# EAGLE board filterboard2layer (EAGLE 6.6.0)
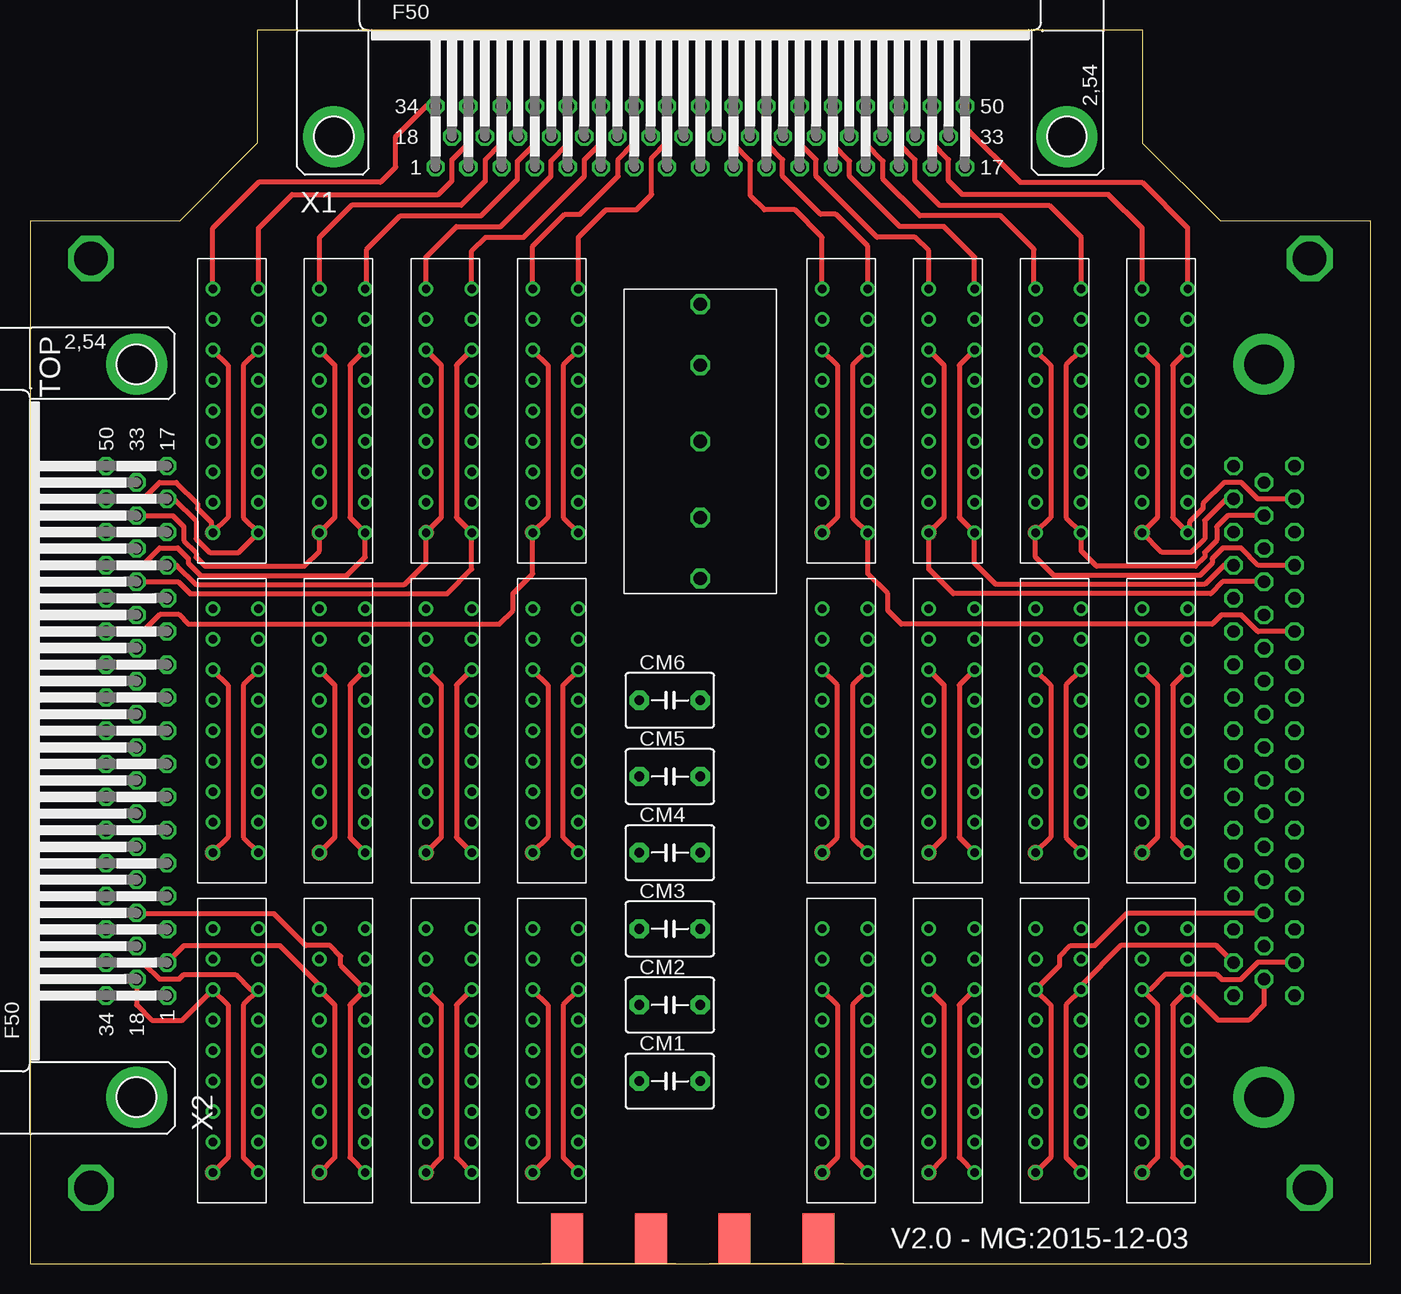
[diagram p0: board, top side]
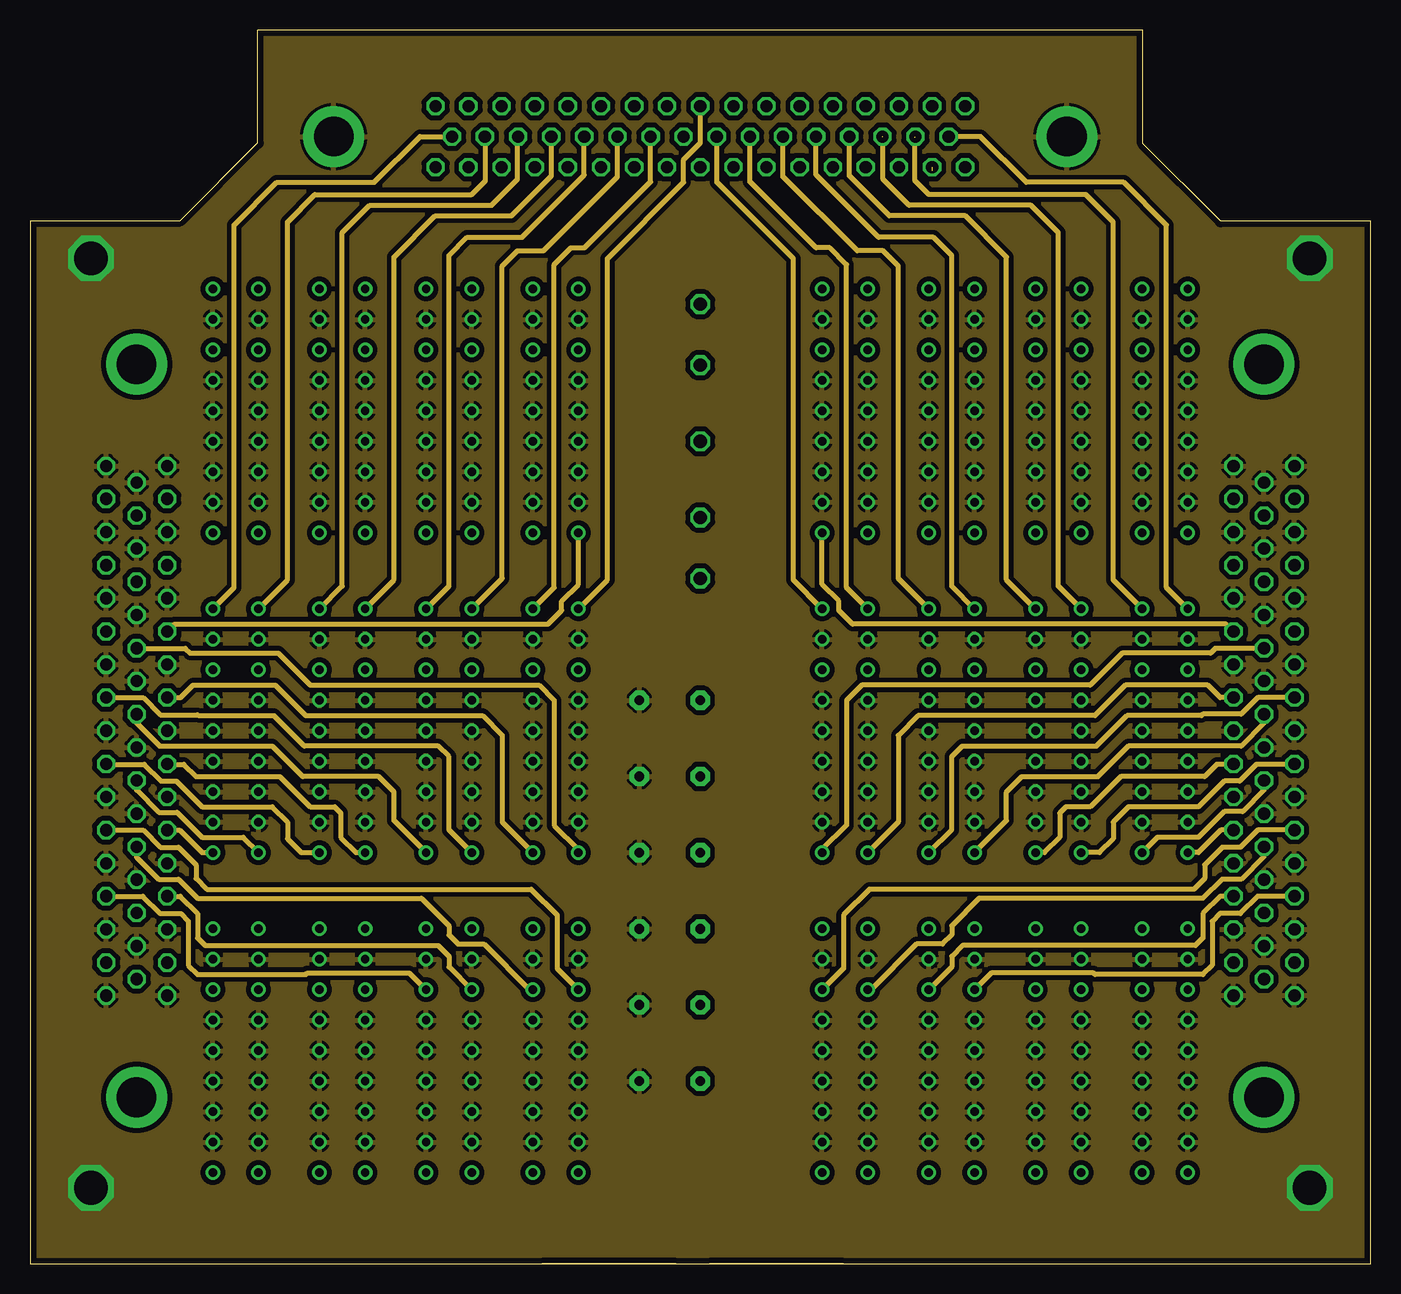
[diagram p1: board, inner layer Route2]
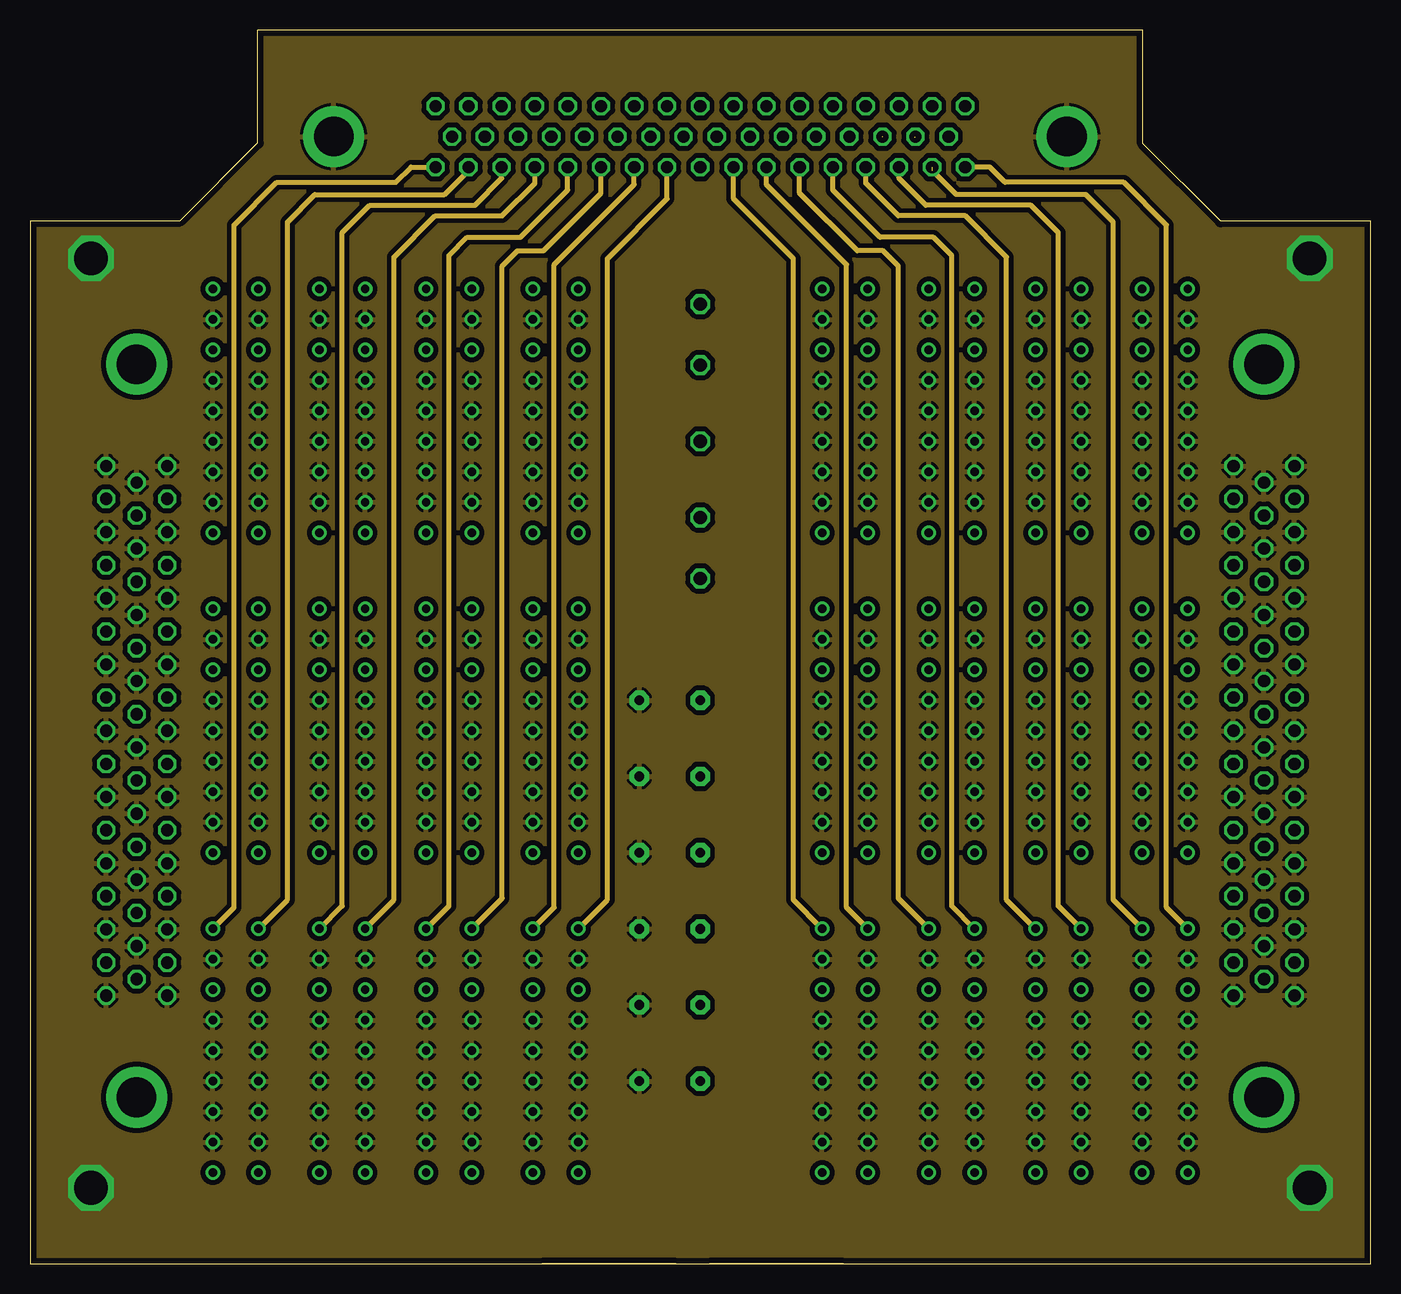
[diagram p2: board, inner layer Route15]
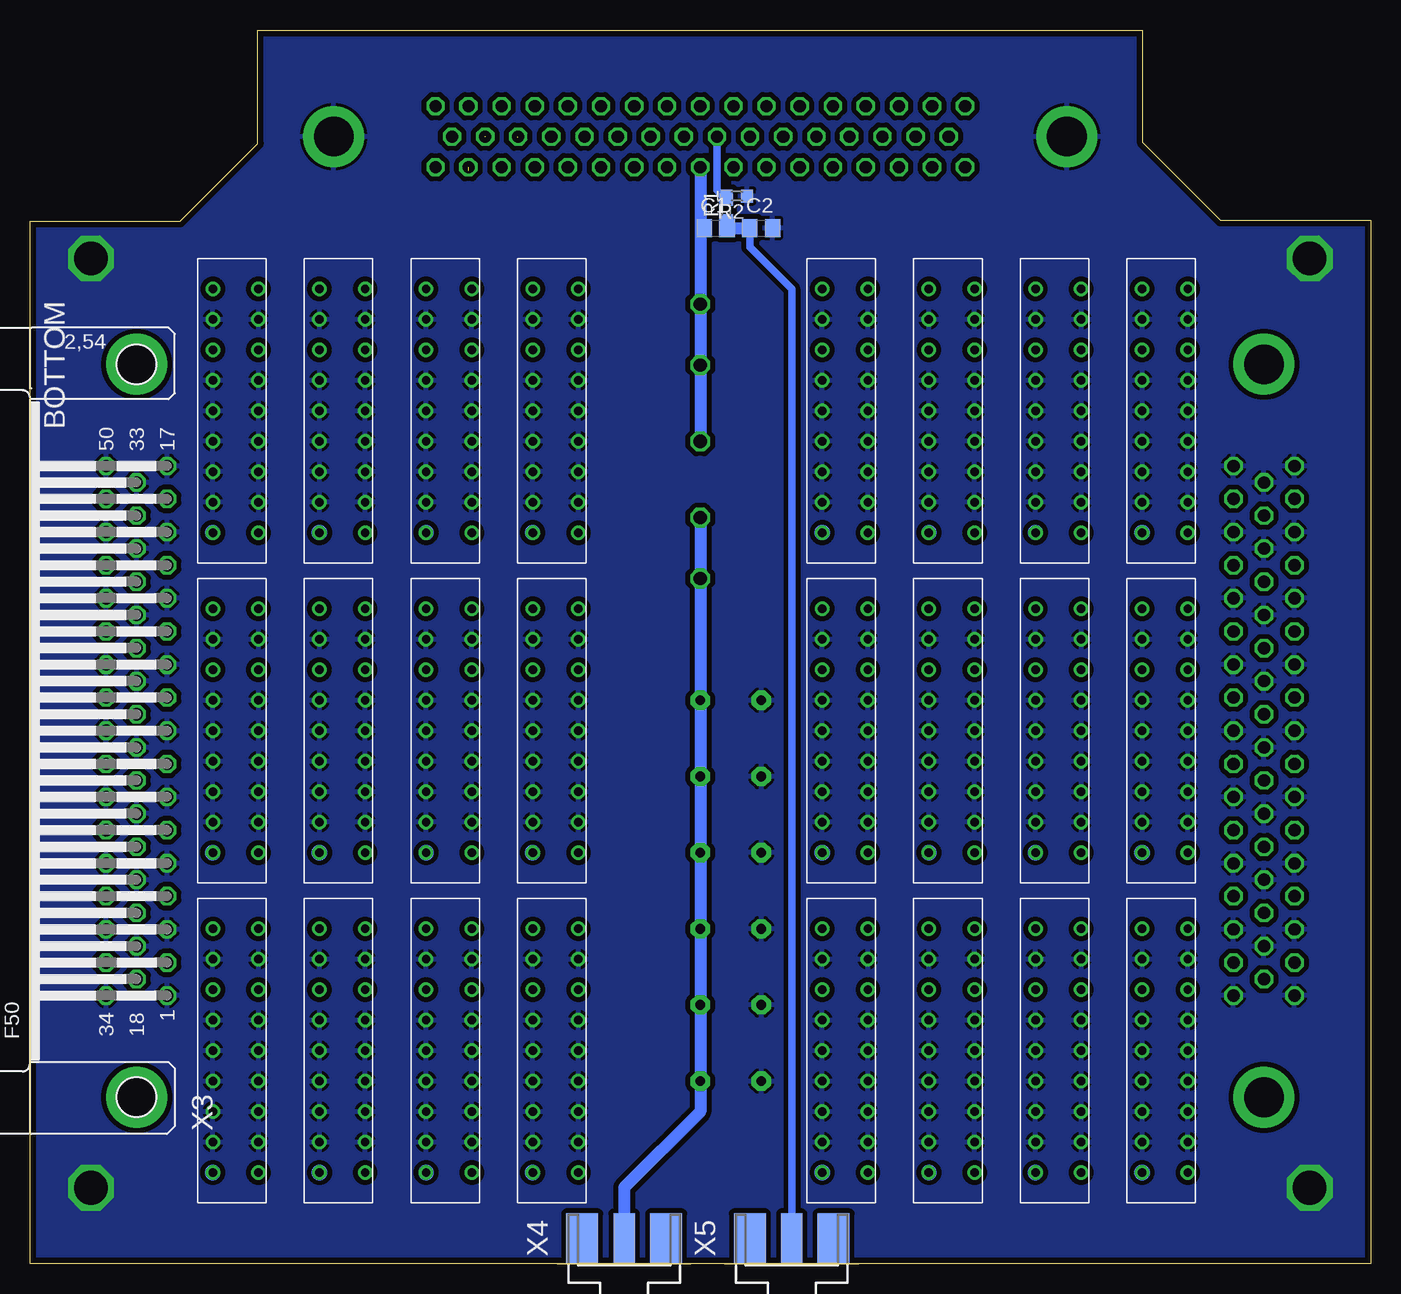
[diagram p3: board, bottom side, seen from below]

Size 111.76 x 102.87 mm. Coordinates in mm from the lower left corner, seen from the top.
Outline: 0,0 111.76,0 111.76,86.93 99.25,86.93 92.77,93.41 92.77,102.87 18.99,102.87 18.99,93.47 12.51,86.99 0,86.99 0,0
Copper layers (1*2*15*16): Top 0.035mm / dielectric 0.27mm / Route2 0.035mm / dielectric 0.27mm / Route15 0.035mm / dielectric 0.27mm / Bottom 0.035mm
Design rules "DRC_AdvancedCircuits *": minimum track width 5mil, minimum drill 15mil, track to track 5mil, track to pad 5mil, pad to pad 5mil, via to via 5mil, smd to smd 3mil, copper to edge 20mil, drill to drill 10mil, minimum pad ring 10mil, minimum via ring 8mil, stop-mask expansion 4mil, vias tented up to drill 15mil, thermal gap 10mil

## Footprints (pad centres in the part's own frame; a part is rotated, then mirrored left to right if it is on the bottom)
C0805 = smd 1.3 x 1.5: 1 -0.95,0; 2 0.95,0
C5B4.5 = drill 0.813 pad 1.6 octagon: 1 -2.54,0; 2 2.54,0
R0603 = smd 1 x 1.1: 1 -0.85,0; 2 0.85,0
COILCRAFT-LC7POLE = drill 0.7: FILTER-INPUT -10.16,0; FILTER-OUTPUT 10.16,0; GND0 -7.62,0; GND1 -2.54,0; GND2 2.54,0; GND3 7.62,0; NC0 -5.08,0; NC1 0,0; NC2 5.08,0
XINDUCTOR = drill 1.1 octagon: INPUT -11.43,0; INPUT2 -6.35,0; INPUT3 0,0; OUTPUT1 6.35,0; OUTPUT2 11.43,0
F50HP = drill 1.016 octagon: 1 -22.073,-2.54; 2 -19.329,-2.54; 3 -16.561,-2.54; 4 -13.792,-2.54; 5 -11.049,-2.54; 6 -8.28,-2.54; 7 -5.512,-2.54; 8 -2.769,-2.54; 9 0,-2.54; 10 2.769,-2.54; 11 5.512,-2.54; 12 8.28,-2.54; 13 11.049,-2.54; 14 13.792,-2.54; 15 16.561,-2.54; 16 19.329,-2.54; 17 22.073,-2.54; 18 -20.701,0; 19 -17.958,0; 20 -15.189,0; 21 -12.421,0; 22 -9.677,0; 23 -6.909,0; 24 -4.14,0; 25 -1.397,0; 26 1.372,0; 27 4.14,0; 28 6.883,0; 29 9.652,0; 30 12.421,0; 31 15.189,0; 32 17.932,0; 33 20.701,0; 34 -22.073,2.54; 35 -19.329,2.54; 36 -16.561,2.54; 37 -13.792,2.54; 38 -11.049,2.54; 39 -8.28,2.54; 40 -5.512,2.54; 41 -2.769,2.54; 42 0,2.54; 43 2.769,2.54; 44 5.512,2.54; 45 8.28,2.54; 46 11.049,2.54; 47 13.792,2.54; 48 16.561,2.54; 49 19.329,2.54; 50 22.073,2.54 | drill 3.302 pad 5.08: G1 -30.556,0; G2 30.556,0
J502-ND-142-0711-821/826 = smd 4.191 x 1.778: 1 2.115,0 | smd 4.191 x 2.667: G@1 2.115,3.495; G@2 2.115,-3.495 | smd 4.191 x 2.667 bottom: G@3 2.115,3.495; G@4 2.115,-3.495

## Placement (x,y rotation side)
C1  1pF  [C0805]  54.61,86.36 0 bottom
C2  1000pF  [C0805]  50.8,86.36 0 bottom
CM1  [C5B4.5]  53.34,15.24 0 top
CM2  [C5B4.5]  53.34,21.59 0 top
CM3  [C5B4.5]  53.34,27.94 0 top
CM4  [C5B4.5]  53.34,34.29 0 top
CM5  [C5B4.5]  53.34,40.64 0 top
CM6  [C5B4.5]  53.34,46.99 0 top
R1  [R0603]  53.72,87.88 90 bottom
R2  [R0603]  52.83,89.03 180 bottom
U$1  COILCRAFT-LC7POLE  [COILCRAFT-LC7POLE]  83.82,44.45 90 top
U$2  COILCRAFT-LC7POLE  [COILCRAFT-LC7POLE]  27.94,44.45 90 bottom
U$3  COILCRAFT-LC7POLE  [COILCRAFT-LC7POLE]  33.02,44.45 90 top
U$4  COILCRAFT-LC7POLE  [COILCRAFT-LC7POLE]  36.83,44.45 90 bottom
U$5  COILCRAFT-LC7POLE  [COILCRAFT-LC7POLE]  41.91,71.12 90 top
U$6  COILCRAFT-LC7POLE  [COILCRAFT-LC7POLE]  41.91,44.45 90 top
U$7  COILCRAFT-LC7POLE  [COILCRAFT-LC7POLE]  15.24,71.12 90 top
U$8  COILCRAFT-LC7POLE  [COILCRAFT-LC7POLE]  24.13,71.12 90 top
U$9  COILCRAFT-LC7POLE  [COILCRAFT-LC7POLE]  19.05,71.12 90 bottom
U$10  COILCRAFT-LC7POLE  [COILCRAFT-LC7POLE]  45.72,17.78 90 bottom
U$11  COILCRAFT-LC7POLE  [COILCRAFT-LC7POLE]  36.83,17.78 90 bottom
U$12  COILCRAFT-LC7POLE  [COILCRAFT-LC7POLE]  15.24,44.45 90 top
U$13  COILCRAFT-LC7POLE  [COILCRAFT-LC7POLE]  78.74,44.45 90 bottom
U$14  COILCRAFT-LC7POLE  [COILCRAFT-LC7POLE]  74.93,44.45 90 top
U$15  COILCRAFT-LC7POLE  [COILCRAFT-LC7POLE]  69.85,71.12 90 bottom
U$16  COILCRAFT-LC7POLE  [COILCRAFT-LC7POLE]  69.85,44.45 90 bottom
U$17  COILCRAFT-LC7POLE  [COILCRAFT-LC7POLE]  96.52,71.12 90 bottom
U$18  COILCRAFT-LC7POLE  [COILCRAFT-LC7POLE]  19.05,17.78 90 bottom
U$19  COILCRAFT-LC7POLE  [COILCRAFT-LC7POLE]  24.13,17.78 90 top
U$20  COILCRAFT-LC7POLE  [COILCRAFT-LC7POLE]  27.94,17.78 90 bottom
U$21  COILCRAFT-LC7POLE  [COILCRAFT-LC7POLE]  33.02,71.12 90 top
U$22  COILCRAFT-LC7POLE  [COILCRAFT-LC7POLE]  27.94,71.12 90 bottom
U$23  COILCRAFT-LC7POLE  [COILCRAFT-LC7POLE]  87.63,71.12 90 bottom
U$24  COILCRAFT-LC7POLE  [COILCRAFT-LC7POLE]  92.71,71.12 90 top
U$25  COILCRAFT-LC7POLE  [COILCRAFT-LC7POLE]  66.04,17.78 90 top
U$26  COILCRAFT-LC7POLE  [COILCRAFT-LC7POLE]  74.93,17.78 90 top
U$27  COILCRAFT-LC7POLE  [COILCRAFT-LC7POLE]  96.52,44.45 90 bottom
U$28  COILCRAFT-LC7POLE  [COILCRAFT-LC7POLE]  92.71,17.78 90 top
U$29  COILCRAFT-LC7POLE  [COILCRAFT-LC7POLE]  87.63,17.78 90 bottom
U$30  COILCRAFT-LC7POLE  [COILCRAFT-LC7POLE]  83.82,17.78 90 top
U$31  COILCRAFT-LC7POLE  [COILCRAFT-LC7POLE]  78.74,71.12 90 bottom
U$32  COILCRAFT-LC7POLE  [COILCRAFT-LC7POLE]  83.82,71.12 90 top
U$33  COILCRAFT-LC7POLE  [COILCRAFT-LC7POLE]  69.85,17.78 90 bottom
U$34  COILCRAFT-LC7POLE  [COILCRAFT-LC7POLE]  41.91,17.78 90 top
U$35  COILCRAFT-LC7POLE  [COILCRAFT-LC7POLE]  15.24,17.78 90 top
U$36  COILCRAFT-LC7POLE  [COILCRAFT-LC7POLE]  24.13,44.45 90 top
U$37  COILCRAFT-LC7POLE  [COILCRAFT-LC7POLE]  96.52,17.78 90 bottom
U$38  COILCRAFT-LC7POLE  [COILCRAFT-LC7POLE]  87.63,44.45 90 bottom
U$39  COILCRAFT-LC7POLE  [COILCRAFT-LC7POLE]  78.74,17.78 90 bottom
U$40  COILCRAFT-LC7POLE  [COILCRAFT-LC7POLE]  74.93,71.12 90 top
U$41  COILCRAFT-LC7POLE  [COILCRAFT-LC7POLE]  33.02,17.78 90 top
U$42  COILCRAFT-LC7POLE  [COILCRAFT-LC7POLE]  36.83,71.12 90 bottom
U$43  COILCRAFT-LC7POLE  [COILCRAFT-LC7POLE]  19.05,44.45 90 bottom
U$44  COILCRAFT-LC7POLE  [COILCRAFT-LC7POLE]  92.71,44.45 90 top
U$45  COILCRAFT-LC7POLE  [COILCRAFT-LC7POLE]  66.04,44.45 90 top
U$46  COILCRAFT-LC7POLE  [COILCRAFT-LC7POLE]  45.72,44.45 90 bottom
U$47  COILCRAFT-LC7POLE  [COILCRAFT-LC7POLE]  45.72,71.12 90 bottom
U$48  COILCRAFT-LC7POLE  [COILCRAFT-LC7POLE]  66.04,71.12 90 top
U$49  XINDUCTOR  [XINDUCTOR]  55.88,68.58 90 top
X1  [F50HP]  55.88,93.98 0 top
X2  [F50HP]  8.89,44.45 90 top
X3  [F50HP]  102.87,44.45 90 bottom
X4  RF IN  [J502-ND-142-0711-821/826]  62.23,0 90 bottom
X5  RF tap  [J502-ND-142-0711-821/826]  48.26,0 90 bottom

## Library data of the parts
C1 C2 = eagle-ltspice; SPICEMODEL: NONE; SPICEPREFIX: C
CM1-CM6 = capacitor-wima
R1 R2 = eagle-ltspice; SPICEMODEL: NONE; SPICEPREFIX: R
U$1-U$48 = Eagle-LC7Filter
U$49 = MichaelsLibrary
X1-X3 = con-subd; OC_FARNELL: unknown; OC_NEWARK: unknown
X4 X5 = con-coax; MF: JOHNSON COMPONENTS; MPN: 142-0711-821; OC_FARNELL: 1019328; OC_NEWARK: 16F3627

## Nets
GND: C2.2 CM1.1 CM2.1 CM3.1 CM4.1 CM5.1 CM6.1 R2.1 U$1.GND0 U$1.GND1 U$1.GND2 U$1.GND3 U$1.NC0 U$1.NC1 U$2.GND0 U$2.GND1 U$2.GND2 U$2.GND3 U$2.NC0 U$2.NC1 U$3.GND0 U$3.GND1 U$3.GND2 U$3.GND3 U$3.NC0 U$3.NC1 U$4.GND0 U$4.GND1 U$4.GND2 U$4.GND3 U$4.NC0 U$4.NC1 U$5.GND0 U$5.GND1 U$5.GND2 U$5.GND3 U$5.NC0 U$5.NC1 U$6.GND0 U$6.GND1 U$6.GND2 U$6.GND3 U$6.NC0 U$6.NC1 U$7.GND0 U$7.GND1 U$7.GND2 U$7.GND3 U$7.NC0 U$7.NC1 U$8.GND0 U$8.GND1 U$8.GND2 U$8.GND3 U$8.NC0 U$8.NC1 U$9.GND0 U$9.GND1 U$9.GND2 U$9.GND3 U$9.NC0 U$9.NC1 U$10.GND0 U$10.GND1 U$10.GND2 U$10.GND3 U$10.NC0 U$10.NC1 U$11.GND0 U$11.GND1 U$11.GND2 U$11.GND3 U$11.NC0 U$11.NC1 U$12.GND0 U$12.GND1 U$12.GND2 U$12.GND3 U$12.NC0 U$12.NC1 U$13.GND0 U$13.GND1 U$13.GND2 U$13.GND3 U$13.NC0 U$13.NC1 U$14.GND0 U$14.GND1 U$14.GND2 U$14.GND3 U$14.NC0 U$14.NC1 U$15.GND0 U$15.GND1 U$15.GND2 U$15.GND3 U$15.NC0 U$15.NC1 U$16.GND0 U$16.GND1 U$16.GND2 U$16.GND3 U$16.NC0 U$16.NC1 U$17.GND0 U$17.GND1 U$17.GND2 U$17.GND3 U$17.NC0 U$17.NC1 U$18.GND0 U$18.GND1 U$18.GND2 U$18.GND3 U$18.NC0 U$18.NC1 U$19.GND0 U$19.GND1 U$19.GND2 U$19.GND3 U$19.NC0 U$19.NC1 U$20.GND0 U$20.GND1 U$20.GND2 U$20.GND3 U$20.NC0 U$20.NC1 U$21.GND0 U$21.GND1 U$21.GND2 U$21.GND3 U$21.NC0 U$21.NC1 U$22.GND0 U$22.GND1 U$22.GND2 U$22.GND3 U$22.NC0 U$22.NC1 U$23.GND0 U$23.GND1 U$23.GND2 U$23.GND3 U$23.NC0 U$23.NC1 U$24.GND0 U$24.GND1 U$24.GND2 U$24.GND3 U$24.NC0 U$24.NC1 U$25.GND0 U$25.GND1 U$25.GND2 U$25.GND3 U$25.NC0 U$25.NC1 U$26.GND0 U$26.GND1 U$26.GND2 U$26.GND3 U$26.NC0 U$26.NC1 U$27.GND0 U$27.GND1 U$27.GND2 U$27.GND3 U$27.NC0 U$27.NC1 U$28.GND0 U$28.GND1 U$28.GND2 U$28.GND3 U$28.NC0 U$28.NC1 U$29.GND0 U$29.GND1 U$29.GND2 U$29.GND3 U$29.NC0 U$29.NC1 U$30.GND0 U$30.GND1 U$30.GND2 U$30.GND3 U$30.NC0 U$30.NC1 U$31.GND0 U$31.GND1 U$31.GND2 U$31.GND3 U$31.NC0 U$31.NC1 U$32.GND0 U$32.GND1 U$32.GND2 U$32.GND3 U$32.NC0 U$32.NC1 U$33.GND0 U$33.GND1 U$33.GND2 U$33.GND3 U$33.NC0 U$33.NC1 U$34.GND0 U$34.GND1 U$34.GND2 U$34.GND3 U$34.NC0 U$34.NC1 U$35.GND0 U$35.GND1 U$35.GND2 U$35.GND3 U$35.NC0 U$35.NC1 U$36.GND0 U$36.GND1 U$36.GND2 U$36.GND3 U$36.NC0 U$36.NC1 U$37.GND0 U$37.GND1 U$37.GND2 U$37.GND3 U$37.NC0 U$37.NC1 U$38.GND0 U$38.GND1 U$38.GND2 U$38.GND3 U$38.NC0 U$38.NC1 U$39.GND0 U$39.GND1 U$39.GND2 U$39.GND3 U$39.NC0 U$39.NC1 U$40.GND0 U$40.GND1 U$40.GND2 U$40.GND3 U$40.NC0 U$40.NC1 U$41.GND0 U$41.GND1 U$41.GND2 U$41.GND3 U$41.NC0 U$41.NC1 U$42.GND0 U$42.GND1 U$42.GND2 U$42.GND3 U$42.NC0 U$42.NC1 U$43.GND0 U$43.GND1 U$43.GND2 U$43.GND3 U$43.NC0 U$43.NC1 U$44.GND0 U$44.GND1 U$44.GND2 U$44.GND3 U$44.NC0 U$44.NC1 U$45.GND0 U$45.GND1 U$45.GND2 U$45.GND3 U$45.NC0 U$45.NC1 U$46.GND0 U$46.GND1 U$46.GND2 U$46.GND3 U$46.NC0 U$46.NC1 U$47.GND0 U$47.GND1 U$47.GND2 U$47.GND3 U$47.NC0 U$47.NC1 U$48.GND0 U$48.GND1 U$48.GND2 U$48.GND3 U$48.NC0 U$48.NC1 X1.G1 X1.G2 X2.1 X2.3 X2.5 X2.7 X2.9 X2.11 X2.13 X2.15 X2.17 X2.19 X2.21 X2.23 X2.25 X2.27 X2.29 X2.31 X2.33 X2.34 X2.36 X2.38 X2.40 X2.42 X2.44 X2.46 X2.48 X2.50 X3.1 X3.3 X3.5 X3.7 X3.9 X3.11 X3.13 X3.15 X3.17 X3.19 X3.21 X3.23 X3.25 X3.27 X3.29 X3.31 X3.33 X3.34 X3.36 X3.38 X3.40 X3.42 X3.44 X3.46 X3.48 X3.50
N$1: C1.1
N$2: C1.2 C2.1 X5.1
N$5: R1.2 X1.25
S$1: U$49.INPUT3 U$49.OUTPUT1 U$49.OUTPUT2 X1.9
S$2: CM1.2 CM2.2 CM3.2 CM4.2 CM5.2 CM6.2 U$49.INPUT U$49.INPUT2 X4.1
S$3: U$7.FILTER-OUTPUT X1.34
S$4: U$9.FILTER-OUTPUT X1.35
S$5: U$8.FILTER-OUTPUT X1.36
S$6: U$22.FILTER-OUTPUT X1.37
S$7: U$21.FILTER-OUTPUT X1.38
S$8: U$42.FILTER-OUTPUT X1.39
S$9: U$5.FILTER-OUTPUT X1.40
S$10: U$12.FILTER-OUTPUT X1.18
S$11: U$43.FILTER-OUTPUT X1.19
S$12: U$36.FILTER-OUTPUT X1.20
S$13: U$2.FILTER-OUTPUT X1.21
S$14: U$3.FILTER-OUTPUT X1.22
S$15: U$4.FILTER-OUTPUT X1.23
S$16: U$6.FILTER-OUTPUT X1.24
S$17: U$47.FILTER-OUTPUT X1.41
S$18: U$46.FILTER-OUTPUT X1.42
S$19: U$35.FILTER-OUTPUT X1.1
S$20: U$18.FILTER-OUTPUT X1.2
S$21: U$19.FILTER-OUTPUT X1.3
S$22: U$20.FILTER-OUTPUT X1.4
S$23: U$41.FILTER-OUTPUT X1.5
S$24: U$11.FILTER-OUTPUT X1.6
S$25: U$34.FILTER-OUTPUT X1.7
S$26: U$10.FILTER-OUTPUT X1.8
S$27: U$35.FILTER-INPUT U$35.NC2 X2.18
S$28: U$18.FILTER-INPUT U$18.NC2 X2.35
S$29: U$19.FILTER-INPUT U$19.NC2 X2.2
S$30: U$20.NC2 X2.20
S$31: U$41.FILTER-INPUT U$41.NC2 X2.37
S$32: U$11.FILTER-INPUT U$11.NC2 X2.4
S$33: U$34.FILTER-INPUT U$34.NC2 X2.22
S$34: U$10.FILTER-INPUT U$10.NC2 X2.39
S$35: U$12.FILTER-INPUT U$12.NC2 X2.6
S$36: U$43.FILTER-INPUT U$43.NC2 X2.24
S$37: U$36.FILTER-INPUT U$36.NC2 X2.41
S$38: U$2.FILTER-INPUT U$2.NC2 X2.8
S$39: U$3.FILTER-INPUT U$3.NC2 X2.26
S$40: U$4.FILTER-INPUT U$4.NC2 X2.43
S$41: U$6.FILTER-INPUT U$6.NC2 X2.10
S$42: U$46.FILTER-INPUT U$46.NC2 X2.28
S$43: U$47.FILTER-INPUT U$47.NC2 X2.12
S$44: U$5.FILTER-INPUT U$5.NC2 X2.45
S$45: U$42.FILTER-INPUT U$42.NC2 X2.30
S$46: U$21.FILTER-INPUT U$21.NC2 X2.14
S$47: U$22.FILTER-INPUT U$22.NC2 X2.47
S$48: U$8.FILTER-INPUT U$8.NC2 X2.32
S$49: U$9.FILTER-INPUT U$9.NC2 X2.16
S$50: U$7.FILTER-INPUT U$7.NC2 X2.49
S$51: U$17.FILTER-OUTPUT X1.50
S$52: U$24.FILTER-OUTPUT X1.49
S$53: U$23.FILTER-OUTPUT X1.48
S$54: U$32.FILTER-OUTPUT X1.47
S$55: U$31.FILTER-OUTPUT X1.46
S$56: U$40.FILTER-OUTPUT X1.45
S$57: U$15.FILTER-OUTPUT X1.44
S$58: U$27.FILTER-OUTPUT X1.33
S$59: U$44.FILTER-OUTPUT X1.32
S$60: U$38.FILTER-OUTPUT X1.31
S$61: U$1.FILTER-OUTPUT X1.30
S$62: U$13.FILTER-OUTPUT X1.29
S$63: U$14.FILTER-OUTPUT X1.28
S$64: U$16.FILTER-OUTPUT X1.27
S$65: U$48.FILTER-OUTPUT X1.43
S$66: U$45.FILTER-OUTPUT X1.26
S$67: U$37.FILTER-OUTPUT X1.17
S$68: U$28.FILTER-OUTPUT X1.16
S$69: U$29.FILTER-OUTPUT X1.15
S$70: U$30.FILTER-OUTPUT X1.14
S$71: U$39.FILTER-OUTPUT X1.13
S$72: U$26.FILTER-OUTPUT X1.12
S$73: U$33.FILTER-OUTPUT X1.11
S$74: U$25.FILTER-OUTPUT X1.10
S$75: U$37.FILTER-INPUT U$37.NC2 X3.18
S$76: U$28.FILTER-INPUT U$28.NC2 X3.35
S$77: U$29.FILTER-INPUT U$29.NC2 X3.2
S$78: U$30.NC2 X3.20
S$79: U$39.FILTER-INPUT U$39.NC2 X3.37
S$80: U$26.FILTER-INPUT U$26.NC2 X3.4
S$81: U$33.FILTER-INPUT U$33.NC2 X3.22
S$82: U$25.FILTER-INPUT U$25.NC2 X3.39
S$83: U$27.FILTER-INPUT U$27.NC2 X3.6
S$84: U$44.FILTER-INPUT U$44.NC2 X3.24
S$85: U$38.FILTER-INPUT U$38.NC2 X3.41
S$86: U$1.FILTER-INPUT U$1.NC2 X3.8
S$87: U$13.FILTER-INPUT U$13.NC2 X3.26
S$88: U$14.FILTER-INPUT U$14.NC2 X3.43
S$89: U$16.FILTER-INPUT U$16.NC2 X3.10
S$90: U$45.FILTER-INPUT U$45.NC2 X3.28
S$91: U$48.FILTER-INPUT U$48.NC2 X3.12
S$92: U$15.FILTER-INPUT U$15.NC2 X3.45
S$93: U$40.FILTER-INPUT U$40.NC2 X3.30
S$94: U$31.FILTER-INPUT U$31.NC2 X3.14
S$95: U$32.FILTER-INPUT U$32.NC2 X3.47
S$96: U$23.FILTER-INPUT U$23.NC2 X3.32
S$97: U$24.FILTER-INPUT U$24.NC2 X3.16
S$98: U$17.FILTER-INPUT U$17.NC2 X3.49

## Tracks (layer width: path | path; a pad name or v marks a point on that pad's centre or on a via)
GND  (via drill 2.8)
  other vias: 5.08,83.82 106.68,83.82 106.68,6.35 5.08,6.35
  pour Bottom (isolate 0.406, rank 2): 0,102.87 111.76,102.87 111.76,0 0,0
  pour Route2 (isolate 0.406): 0,102.87 111.76,102.87 111.76,0 0,0
  pour Route15 (isolate 0.406): 0,102.87 111.76,102.87 111.76,0 0,0
N$2
  Bottom 0.61: C2.1 51.75,84.77 48.26,81.28 X5.1
  Bottom 1.016: C1.2 C2.1
N$5
  Bottom 0.61: X1.25 54.48,89.5 R1.2
S$1
  Bottom 1.016: X1.9 U$49.OUTPUT2 U$49.OUTPUT1 U$49.INPUT3
S$2
  Bottom 1.016: U$49.INPUT2 U$49.INPUT CM6.2 CM5.2 CM4.2 CM3.2 CM2.2 CM1.2 55.88,12.7 62.23,6.35 X4.1
S$3
  Top 0.406: X1.34 33.02,96.52 30.48,93.98 30.48,91.44 29.21,90.17 19.05,90.17 15.24,86.36 U$7.FILTER-OUTPUT
S$4
  Top 0.406: X1.35 36.55,93.45 35.18,92.08 35.18,90.3 34.04,89.15 21.84,89.15 19.05,86.36 U$9.FILTER-OUTPUT
S$5
  Top 0.406: X1.36 39.32,93.42 37.97,92.08 37.97,90.3 35.94,88.27 26.8,88.27 24.13,85.6 U$8.FILTER-OUTPUT
S$6
  Top 0.406: U$22.FILTER-OUTPUT 28.07,81.41 28.07,84.58 30.86,87.38 37.59,87.38 40.64,90.42 40.64,91.95 42.09,93.4 X1.37
S$7
  Top 0.406: U$21.FILTER-OUTPUT 33.02,83.95 35.56,86.49 39.24,86.49 43.43,90.68 43.43,91.95 44.83,93.34 X1.38
S$8
  Top 0.406: U$42.FILTER-OUTPUT 36.83,84.45 37.97,85.6 41.15,85.6 46.23,90.68 46.23,92.08 47.6,93.45 X1.39
S$9
  Top 0.406: U$5.FILTER-OUTPUT 41.91,84.84 44.58,87.5 45.85,87.5 49.02,90.68 49.02,92.08 50.37,93.42 X1.40
S$10
  Route2 0.406: U$12.FILTER-OUTPUT 17.02,56.39 17.02,86.61 20.57,90.17 28.7,90.17 32.51,93.98 X1.18
S$11
  Route2 0.406: U$43.FILTER-OUTPUT 21.46,57.02 21.46,86.87 23.75,89.15 36.83,89.15 37.97,90.3 37.97,93.93 X1.19
S$12
  Route2 0.406: U$36.FILTER-OUTPUT 26.04,56.52 26.04,85.98 28.32,88.27 38.48,88.27 40.64,90.42 40.64,93.93 X1.20
S$13
  Route2 0.406: U$2.FILTER-OUTPUT 30.35,57.02 30.35,83.95 33.78,87.38 40.13,87.38 43.46,90.7 X1.21
S$14
  Route2 0.406: U$3.FILTER-OUTPUT 34.92,56.52 34.92,84.07 36.45,85.6 41.02,85.6 46.2,90.78 X1.22
S$15
  Route2 0.406: U$4.FILTER-OUTPUT 39.37,57.15 39.37,83.19 40.64,84.45 42.8,84.45 48.97,90.63 X1.23
S$16
  Route2 0.406: U$6.FILTER-OUTPUT 43.69,56.39 43.69,83.31 45.09,84.71 46.23,84.71 51.74,90.22 X1.24
S$17
  Top 0.406: U$47.FILTER-OUTPUT 45.72,85.6 48.01,87.88 50.55,87.88 51.82,89.15 51.82,92.2 53.11,93.5 X1.41
S$18
  Route2 0.406: U$46.FILTER-OUTPUT 48.13,57.02 48.13,83.82 54.48,90.17 54.48,92.08 55.88,93.47 X1.42
S$19
  Route15 0.406: U$35.FILTER-OUTPUT 17.02,29.72 17.02,86.61 20.57,90.17 30.48,90.17 31.75,91.44 X1.1
S$20
  Route15 0.406: U$18.FILTER-OUTPUT 21.46,30.35 21.46,86.87 23.75,89.15 34.54,89.15 36.55,91.16 X1.2
S$21
  Route15 0.406: U$19.FILTER-OUTPUT 26.04,29.84 26.04,85.98 28.32,88.27 37.08,88.27 39.32,90.5 X1.3
S$22
  Route15 0.406: U$20.FILTER-OUTPUT 30.35,30.35 30.35,83.95 33.78,87.38 39.37,87.38 42.09,90.09 X1.4
S$23
  Route15 0.406: U$41.FILTER-OUTPUT 34.92,29.84 34.92,84.07 36.45,85.6 40.89,85.6 44.83,89.53 X1.5
S$24
  Route15 0.406: U$11.FILTER-OUTPUT 39.37,30.48 39.37,83.19 40.64,84.45 42.8,84.45 47.6,89.26 X1.6
S$25
  Route15 0.406: U$34.FILTER-OUTPUT 43.69,29.72 43.69,83.31 50.37,89.99 X1.7
S$26
  Route15 0.406: U$10.FILTER-OUTPUT 48.13,30.35 48.13,83.82 53.11,88.8 X1.8
S$27
  Top 0.406: X2.18 8.89,21.59 10.16,20.32 12.7,20.32 U$35.NC2 16.51,21.59 16.51,8.89 U$35.FILTER-INPUT
S$28
  Top 0.406: X2.35 6.45,25.02 9.53,25.02 10.79,23.75 12.45,23.75 12.83,24.13 17.14,24.13 18.41,22.86 U$18.NC2 17.78,21.59 17.78,8.89 U$18.FILTER-INPUT
S$29
  Top 0.406: X2.2 12.85,26.54 20.83,26.54 24.13,23.24 U$19.NC2 25.4,21.59 25.4,8.89 U$19.FILTER-INPUT
S$30
  Top 0.406: 27.94,7.62 26.67,8.89 26.67,21.59 U$20.NC2 25.91,24.89 25.91,25.65 25.02,26.54 22.99,26.54 20.32,29.21 8.94,29.21 X2.20
S$31
  Top 0.406: U$41.NC2 34.29,21.59 34.29,8.89 U$41.FILTER-INPUT
  Route2 0.406: X2.37 9.41,30.66 10.86,29.21 12.57,29.21 13.21,28.57 13.21,24.89 13.97,24.13 22.99,24.13 23.11,24.26 31.62,24.26 U$41.NC2
S$32
  Top 0.406: U$11.NC2 35.56,21.59 35.56,8.89 U$11.FILTER-INPUT
  Route2 0.406: X2.4 12.52,30.66 13.97,29.21 13.97,27.18 14.61,26.54 34.04,26.54 34.92,25.65 34.92,24.77 U$11.NC2
S$33
  Top 0.406: U$34.NC2 43.18,21.59 43.18,8.89 U$34.FILTER-INPUT
  Route2 0.406: X2.22 8.89,33.91 10.73,32.07 12.38,32.07 13.97,30.48 32.64,30.48 34.92,28.19 34.92,27.43 35.69,26.67 37.85,26.67 41.66,22.86 U$34.NC2
S$34
  Top 0.406: U$10.NC2 44.45,21.59 44.45,8.89 U$10.FILTER-INPUT
  Route2 0.406: X2.39 9.42,36.17 10.86,34.74 12.38,34.74 13.84,33.27 13.84,32.13 14.73,31.24 41.78,31.24 43.94,29.08 43.94,24.64 U$10.NC2
S$35
  Top 0.406: U$12.NC2 16.51,48.26 16.51,35.56 U$12.FILTER-INPUT
  Route2 0.406: X2.6 12.47,36.17 14.35,34.29 U$12.FILTER-INPUT
S$36
  Top 0.406: U$43.NC2 17.78,48.26 17.78,35.56 U$43.FILTER-INPUT
  Route2 0.406: X2.24 8.89,39.5 10.73,37.66 12.26,37.66 14.35,35.56 17.78,35.56 U$43.FILTER-INPUT
S$37
  Top 0.406: U$36.NC2 25.4,48.26 25.4,35.56 U$36.FILTER-INPUT
  Route2 0.406: X2.41 6.38,41.66 9.53,41.66 10.92,40.26 12.19,40.26 14.35,38.1 20.19,38.1 21.46,36.83 21.46,35.43 22.61,34.29 U$36.FILTER-INPUT
S$38
  Top 0.406: U$2.NC2 26.67,48.26 26.67,35.56 U$2.FILTER-INPUT
  Route2 0.406: X2.8 11.46,41.66 12.83,41.66 13.84,40.64 20.83,40.64 23.37,38.1 25.4,38.1 25.91,37.59 25.91,35.56 27.18,34.29 U$2.FILTER-INPUT
S$39
  Top 0.406: U$3.NC2 34.29,48.26 34.29,35.56 U$3.FILTER-INPUT
  Route2 0.406: X2.26 8.89,45.09 10.79,43.18 20.19,43.18 22.73,40.64 29.08,40.64 30.35,39.37 30.35,36.96 U$3.FILTER-INPUT
S$40
  Top 0.406: U$4.NC2 35.56,48.26 35.56,35.56 U$4.FILTER-INPUT
  Route2 0.406: X2.43 9.42,47.22 10.86,45.78 13.97,45.78 14.1,45.72 20.32,45.72 22.86,43.18 34.04,43.18 34.92,42.29 34.92,36.2 U$4.FILTER-INPUT
S$41
  Top 0.406: U$6.NC2 43.18,48.26 43.18,35.56 U$6.FILTER-INPUT
  Route2 0.406: X2.10 12.55,47.22 13.59,48.26 20.45,48.26 22.99,45.72 37.72,45.72 39.37,44.07 39.37,36.83 U$6.FILTER-INPUT
S$42
  Top 0.406: U$46.FILTER-INPUT 44.45,35.56 44.45,48.26 U$46.NC2
  Route2 0.406: X2.28 8.91,51.31 12.95,51.31 13.34,50.93 20.7,50.93 23.37,48.26 42.42,48.26 43.69,46.99 43.69,36.58 45.72,34.54 U$46.FILTER-INPUT
S$43
  Top 0.406: U$47.NC2 44.45,74.93 44.45,62.23 U$47.FILTER-INPUT
  Route2 0.406: X2.12 12.04,53.34 43.18,53.34 44.32,54.48 44.32,55.25 45.72,56.64 U$47.FILTER-INPUT
S$44
  Top 0.406: X2.45 6.38,52.71 9.4,52.71 10.86,54.17 12.38,54.17 13.21,53.34 39.12,53.34 40.26,54.48 40.26,55.88 41.91,57.53 U$5.FILTER-INPUT 43.18,62.23 43.18,74.93 U$5.NC2
S$45
  Top 0.406: X2.30 12.34,56.87 13.34,55.88 34.8,55.88 36.83,57.91 U$42.FILTER-INPUT 35.56,62.23 35.56,74.93 U$42.NC2
S$46
  Top 0.406: X2.14 12.24,58.24 13.84,56.64 31.24,56.64 33.02,58.42 U$21.FILTER-INPUT 34.29,62.23 34.29,74.93 U$21.NC2
S$47
  Top 0.406: X2.47 9.35,58.24 10.79,59.69 12.32,59.69 13.21,58.8 13.21,58.42 14.22,57.4 26.42,57.4 27.94,58.93 U$22.FILTER-INPUT 26.67,62.23 26.67,74.93 U$22.NC2
S$48
  Top 0.406: X2.32 11.91,62.38 12.83,61.47 12.83,60.33 13.84,59.31 13.84,58.93 14.61,58.17 22.86,58.17 24.13,59.44 U$8.FILTER-INPUT 25.4,62.23 25.4,74.93 U$8.NC2
S$49
  Top 0.406: X2.16 12.04,63.78 13.84,61.98 13.84,60.45 14.99,59.31 17.4,59.31 U$9.FILTER-INPUT 17.78,62.23 17.78,74.93 U$9.NC2
S$50
  Top 0.406: X2.49 9.42,63.78 10.79,65.15 12.19,65.15 13.97,63.37 13.97,62.99 15.11,61.85 15.11,61.09 U$7.FILTER-INPUT 16.51,62.23 16.51,74.93 U$7.NC2
S$51
  Top 0.406: U$17.FILTER-OUTPUT 96.52,86.36 92.71,90.17 82.55,90.17 77.95,94.77 X1.50
S$52
  Top 0.406: U$24.FILTER-OUTPUT 92.71,86.36 89.92,89.15 77.72,89.15 76.58,90.3 76.58,92.08 75.21,93.45 X1.49
S$53
  Top 0.406: U$23.FILTER-OUTPUT 87.63,85.6 84.96,88.27 75.82,88.27 73.79,90.3 73.79,92.08 72.44,93.42 X1.48
S$54
  Top 0.406: U$32.FILTER-OUTPUT 83.69,81.41 83.69,84.58 80.9,87.38 74.17,87.38 71.12,90.42 71.12,91.95 69.67,93.4 X1.47
S$55
  Top 0.406: U$31.FILTER-OUTPUT 78.74,83.95 76.2,86.49 72.52,86.49 68.33,90.68 68.33,91.95 66.93,93.34 X1.46
S$56
  Top 0.406: U$40.FILTER-OUTPUT 74.93,84.45 73.79,85.6 70.61,85.6 65.53,90.68 65.53,92.08 64.16,93.45 X1.45
S$57
  Top 0.406: U$15.FILTER-OUTPUT 69.85,84.84 67.18,87.5 65.91,87.5 62.74,90.68 62.74,92.08 61.39,93.42 X1.44
S$58
  Route2 0.406: U$27.FILTER-OUTPUT 94.74,56.39 94.74,86.61 91.19,90.17 83.06,90.17 79.25,93.98 X1.33
S$59  (1 unrouted)
  Route2 0.406: U$44.FILTER-OUTPUT 90.3,57.02 90.3,86.87 88.01,89.15 74.93,89.15 73.79,90.3 73.79,93.93
S$60  (1 unrouted)
  Route2 0.406: U$38.FILTER-OUTPUT 85.72,56.52 85.72,85.98 83.44,88.27 73.28,88.27 71.12,90.42 71.12,93.93
S$61
  Route2 0.406: U$1.FILTER-OUTPUT 81.41,57.02 81.41,83.95 77.98,87.38 71.63,87.38 68.3,90.7 X1.30
S$62
  Route2 0.406: U$13.FILTER-OUTPUT 76.83,56.52 76.83,84.07 75.31,85.6 70.74,85.6 65.56,90.78 65.53,90.78 X1.29
S$63
  Route2 0.406: U$14.FILTER-OUTPUT 72.39,57.15 72.39,83.19 71.12,84.45 68.96,84.45 62.79,90.63 62.76,90.63 X1.28
S$64
  Route2 0.406: U$16.FILTER-OUTPUT 68.07,56.39 68.07,83.31 66.67,84.71 65.53,84.71 60.02,90.22 X1.27
S$65
  Top 0.406: U$48.FILTER-OUTPUT 66.04,85.6 63.75,87.88 61.21,87.88 60.07,89.03 60.07,91.95 58.65,93.37 X1.43
S$66
  Route2 0.406: U$45.FILTER-OUTPUT 63.63,57.02 63.63,83.82 57.28,90.17 57.25,90.17 X1.26
S$67
  Route15 0.406: U$37.FILTER-OUTPUT 94.74,29.72 94.74,86.61 91.19,90.17 81.28,90.17 80.01,91.44 X1.17
S$68  (1 unrouted)
  Route15 0.406: U$28.FILTER-OUTPUT 90.3,30.35 90.3,86.87 88.01,89.15 77.22,89.15 75.21,91.16
S$69
  Route15 0.406: U$29.FILTER-OUTPUT 85.72,29.84 85.72,85.98 83.44,88.27 74.68,88.27 72.44,90.5 X1.15
S$70
  Route15 0.406: U$30.FILTER-OUTPUT 81.41,30.35 81.41,83.95 77.98,87.38 72.39,87.38 69.67,90.09 X1.14
S$71
  Route15 0.406: U$39.FILTER-OUTPUT 76.83,29.84 76.83,84.07 75.31,85.6 70.87,85.6 66.93,89.53 X1.13
S$72
  Route15 0.406: U$26.FILTER-OUTPUT 72.39,30.48 72.39,83.19 71.12,84.45 68.96,84.45 64.16,89.26 X1.12
S$73
  Route15 0.406: U$33.FILTER-OUTPUT 68.07,29.72 68.07,83.31 61.39,89.99 X1.11
S$74
  Route15 0.406: U$25.FILTER-OUTPUT 63.63,30.35 63.63,83.82 58.65,88.8 X1.10
S$75
  Top 0.406: X3.18 102.87,21.59 101.6,20.32 99.06,20.32 U$37.NC2 95.25,21.59 95.25,8.89 U$37.FILTER-INPUT
S$76
  Top 0.406: X3.35 105.31,25.15 102.36,25.15 100.9,23.69 99.38,23.69 98.93,24.13 94.61,24.13 93.34,22.86 U$28.NC2 93.98,21.59 93.98,8.89 U$28.FILTER-INPUT
S$77
  Top 0.406: X3.2 98.91,26.54 90.93,26.54 87.63,23.24 U$29.NC2 86.36,21.59 86.36,8.89 U$29.FILTER-INPUT
S$78
  Top 0.406: 83.82,7.62 85.09,8.89 85.09,21.59 U$30.NC2 85.85,24.89 85.85,25.65 86.74,26.54 88.77,26.54 91.44,29.21 102.82,29.21 X3.20
S$79
  Top 0.406: U$39.NC2 77.47,21.59 77.47,8.89 U$39.FILTER-INPUT
  Route2 0.406: X3.37 102.35,30.66 100.9,29.21 99.19,29.21 98.55,28.57 98.55,24.89 97.79,24.13 88.77,24.13 88.65,24.26 80.14,24.26 U$39.NC2
S$80
  Top 0.406: U$26.NC2 76.2,21.59 76.2,8.89 U$26.FILTER-INPUT
  Route2 0.406: X3.4 99.24,30.66 97.79,29.21 97.79,27.18 97.16,26.54 77.72,26.54 76.83,25.65 76.83,24.77 U$26.NC2
S$81
  Top 0.406: U$33.NC2 68.58,21.59 68.58,8.89 U$33.FILTER-INPUT
  Route2 0.406: X3.22 102.87,33.97 100.97,32.07 99.38,32.07 97.79,30.48 79.12,30.48 76.83,28.19 76.83,27.43 76.07,26.67 73.91,26.67 70.1,22.86 U$33.NC2
S$82
  Top 0.406: U$25.NC2 67.31,21.59 67.31,8.89 U$25.FILTER-INPUT
  Route2 0.406: X3.39 102.34,36.17 100.9,34.74 99.38,34.74 97.92,33.27 97.92,32.13 97.03,31.24 69.98,31.24 67.82,29.08 67.82,24.64 U$25.NC2
S$83
  Top 0.406: U$27.NC2 95.25,48.26 95.25,35.56 U$27.FILTER-INPUT
  Route2 0.406: X3.6 99.29,36.17 97.41,34.29 U$27.FILTER-INPUT
S$84
  Top 0.406: U$44.NC2 93.98,48.26 93.98,35.56 U$44.FILTER-INPUT
  Route2 0.406: X3.24 102.87,39.5 101.09,37.72 99.57,37.72 97.41,35.56 93.98,35.56 U$44.FILTER-INPUT
S$85
  Top 0.406: U$38.NC2 86.36,48.26 86.36,35.56 U$38.FILTER-INPUT
  Route2 0.406: X3.41 105.39,41.66 102.23,41.66 100.84,40.26 99.57,40.26 97.41,38.1 91.57,38.1 90.3,36.83 90.3,35.43 89.15,34.29 U$38.FILTER-INPUT
S$86
  Top 0.406: U$1.NC2 85.09,48.26 85.09,35.56 U$1.FILTER-INPUT
  Route2 0.406: X3.8 100.31,41.66 98.93,41.66 97.92,40.64 90.93,40.64 88.39,38.1 86.36,38.1 85.85,37.59 85.85,35.56 84.58,34.29 U$1.FILTER-INPUT
S$87
  Top 0.406: U$13.NC2 77.47,48.26 77.47,35.56 U$13.FILTER-INPUT
  Route2 0.406: X3.26 102.87,45.09 100.97,43.18 91.57,43.18 89.03,40.64 82.68,40.64 81.41,39.37 81.41,36.96 U$13.FILTER-INPUT
S$88
  Top 0.406: U$14.NC2 76.2,48.26 76.2,35.56 U$14.FILTER-INPUT
  Route2 0.406: X3.43 102.34,47.22 100.97,45.85 97.79,45.85 97.66,45.72 91.44,45.72 88.9,43.18 77.72,43.18 76.83,42.29 76.83,36.2 U$14.FILTER-INPUT
S$89
  Top 0.406: U$16.NC2 68.58,48.26 68.58,35.56 U$16.FILTER-INPUT
  Route2 0.406: X3.10 99.21,47.22 98.17,48.26 91.31,48.26 88.77,45.72 74.04,45.72 72.39,44.07 72.39,36.83 U$16.FILTER-INPUT
S$90
  Top 0.406: U$45.FILTER-INPUT 67.31,35.56 67.31,48.26 U$45.NC2
  Route2 0.406: X3.28 102.84,51.31 98.81,51.31 98.42,50.93 91.06,50.93 88.39,48.26 69.34,48.26 68.07,46.99 68.07,36.58 66.04,34.54 U$45.FILTER-INPUT
S$91
  Top 0.406: U$48.NC2 67.31,74.93 67.31,62.23 U$48.FILTER-INPUT
  Route2 0.406: X3.12 99.72,53.34 68.58,53.34 67.44,54.48 67.44,55.25 66.04,56.64 U$48.FILTER-INPUT
S$92
  Top 0.406: X3.45 105.39,52.71 102.36,52.71 100.97,54.1 99.31,54.1 98.55,53.34 72.64,53.34 71.5,54.48 71.5,55.88 69.85,57.53 U$15.FILTER-INPUT 68.58,62.23 68.58,74.93 U$15.NC2
S$93
  Top 0.406: X3.30 99.42,56.87 98.42,55.88 76.96,55.88 74.93,57.91 U$40.FILTER-INPUT 76.2,62.23 76.2,74.93 U$40.NC2
S$94
  Top 0.406: X3.14 99.52,58.24 97.92,56.64 80.52,56.64 78.74,58.42 U$31.FILTER-INPUT 77.47,62.23 77.47,74.93 U$31.NC2
S$95
  Top 0.406: X3.47 102.41,58.24 100.97,59.69 99.44,59.69 98.55,58.8 98.55,58.42 97.54,57.4 85.34,57.4 83.82,58.93 U$32.FILTER-INPUT 85.09,62.23 85.09,74.93 U$32.NC2
S$96
  Top 0.406: X3.32 99.85,62.38 98.93,61.47 98.93,60.33 97.92,59.31 97.92,58.93 97.16,58.17 88.9,58.17 87.63,59.44 U$23.FILTER-INPUT 86.36,62.23 86.36,74.93 U$23.NC2
S$97
  Top 0.406: X3.16 99.72,63.78 97.92,61.98 97.92,60.45 96.77,59.31 94.36,59.31 U$24.FILTER-INPUT 93.98,62.23 93.98,74.93 U$24.NC2
S$98
  Top 0.406: X3.49 102.34,63.78 100.97,65.15 99.57,65.15 97.79,63.37 97.79,62.99 96.65,61.85 96.65,61.09 U$17.FILTER-INPUT 95.25,62.23 95.25,74.93 U$17.NC2

## Text on the board
tPlace: TOP | V2.0 - MG:2015-12-03
bPlace: BOTTOM
tDocu: db-34 | db-35 | db-36 | db-37 | db-38 | db-39 | db-40 | db-41 | db-43 | db-44 | db-45 | db-46 | db-47 | db-48 | db-49 | db-50 | db-18 | db-19 | db-20 | db-21 | db-22 | db-23 | db-24 | db-25 | db-26 | db-27 | db-28 | db-29 | db-30 | db-31 | db-32 | db-33 | db-1 | db-2 | db-3 | db-4 | db-5 | db-6 | db-7 | db-41 | db-10 | db-11 | db-12 | db-13 | db-14 | db-15 | db-16 | db-17 | Filter board COILCRAFT P7LP/P3LP